# EAGLE board power source (EAGLE 5.11)
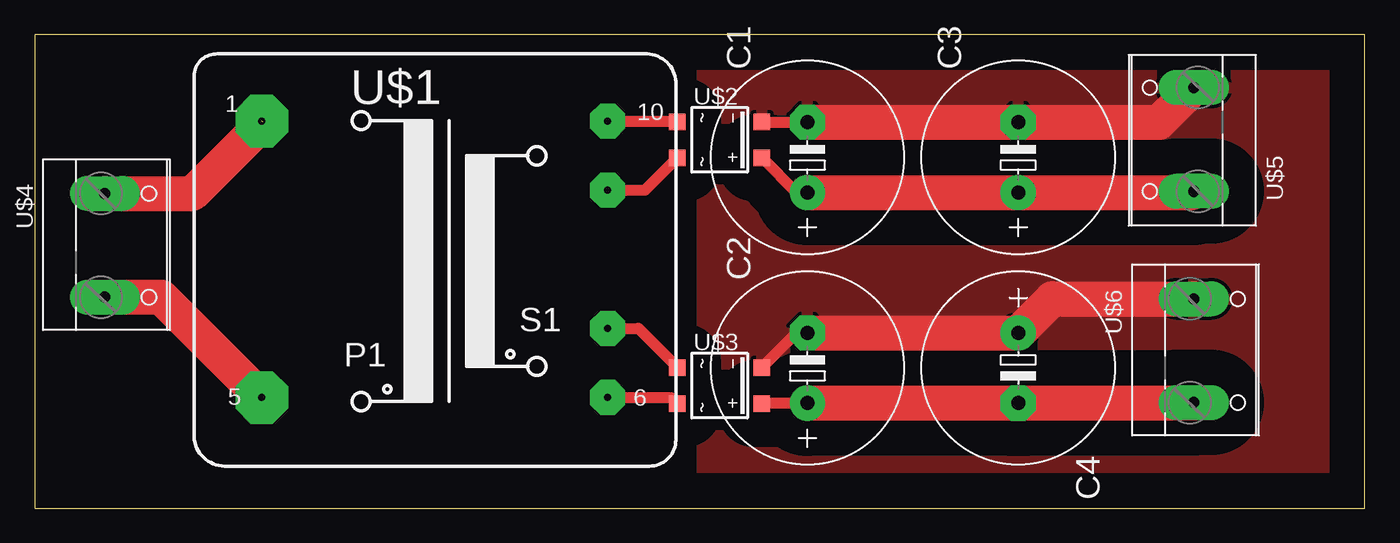
[diagram p0: board, top side]

Size 96.19 x 34.28 mm. Coordinates in mm from the lower left corner, seen from the top.
Outline: 0,0 96.19,0 96.19,34.28 0,34.28 0,0
Copper layers (1*16): Top 0.035mm / dielectric 1.5mm / Bottom 0.035mm
Design rules "default": minimum track width 10mil, minimum drill 24mil, track to track 8mil, track to pad 8mil, pad to pad 8mil, via to via 8mil, smd to smd 8mil, copper to edge 40mil, drill to drill 8mil, minimum pad ring 10mil, minimum via ring 8mil, stop-mask expansion 4mil, vias tented up to drill 0mil, thermal gap 10mil

## Footprints (pad centres in the part's own frame; a part is rotated, then mirrored left to right if it is on the bottom)
E5-13 = drill 1.016 pad 2.54 round: + -2.54,0 | drill 1.016 pad 2.54 octagon: - 2.54,0
BVEI382 = drill 0.5 pad 3.81 octagon: P1 5,-5; P2 5,-25 | drill 0.5 pad 2.54 octagon: S1 30,-25; S2 30,-20; S3 30,-10; S4 30,-5
SOIC-4 = smd 1.2 x 1.2: + 1.3,3.05; - -1.3,3.05; ~1 -1.3,-3.05; ~2 1.3,-3.05
110/2 = drill 0.8 pad 2.54 long: P$1 -3.73,0; P$2 3.77,0

## Placement (x,y rotation side)
C1  1000uF  [E5-13]  55.88,25.4 90 top
C2  1000uF  [E5-13]  55.88,10.16 90 top
C3  1000uF  [E5-13]  71.12,25.4 90 top
C4  1000uF  [E5-13]  71.12,10.16 270 top
U$1  BVEI382  [BVEI382]  11.43,33.02 0 top
U$2  ABS10  [SOIC-4]  49.53,26.67 270 top
U$3  ABS10  [SOIC-4]  49.53,8.89 270 top
U$4  110/2  [110/2]  5.08,19.05 270 top
U$5  110/2  [110/2]  83.82,26.67 90 top
U$6  110/2  [110/2]  83.82,11.43 270 top

## Library data of the parts
C1-C4 = resistor
U$1 = trafo2-2
U$2 U$3 = rectifier
U$4-U$6 = con-wago-500

## Nets
GND: C1.- C2.- C3.- C4.+ U$2.- U$3.- U$5.P$2 U$6.P$1
N$1: U$1.S3 U$2.~2
N$2: U$1.S4 U$2.~1
N$3: U$1.S2 U$3.~1
N$4: U$1.S1 U$3.~2
N$5: U$1.P1 U$4.P$1
N$6: U$1.P2 U$4.P$2
N$7: C2.+ C4.- U$3.+
N$8: U$6.P$2
VCC: C1.+ C3.+ U$2.+ U$5.P$1

## Tracks (layer width: path | path; a pad name or v marks a point on that pad's centre or on a via)
GND
  Top 0.406: U$2.- 52.61,27.94 | 55.09,12.7 C2.-
  Top 0.813: 52.61,27.94 C1.- | U$3.- 55.09,12.7
  Top 2.54: C1.- C3.- 81.32,27.94 U$5.P$2 | C2.- C4.+ 73.58,15.16 U$6.P$1
  pour Top (isolate 2.54): 48.26,36.83 48.26,-1.27 96.52,-1.27 96.52,36.83
N$1
  Top 0.813: U$2.~2 44.13,23.02 U$1.S3
N$2
  Top 0.406: 46.43,28.02 U$2.~1
  Top 0.813: U$1.S4 46.43,28.02
N$3
  Top 0.813: U$3.~1 43.65,13.02 U$1.S2
N$4
  Top 0.406: 46.05,8.02 U$3.~2
  Top 0.813: U$1.S1 46.05,8.02
N$5  (1 unrouted)
  Top 0.406: 16.51,27.86 16.51,27.94
  Top 2.54: 16.51,27.86 11.43,22.78 U$4.P$1
N$6
  Top 2.54: U$1.P2 9.17,15.28 U$4.P$2
N$7
  Top 0.406: U$3.+ 52.61,7.62
  Top 0.813: 52.61,7.62 C2.+
  Top 1.778: C4.- 71.75,7.62
  Top 2.54: C2.+ C4.- | 71.75,7.62 83.82,7.62
VCC
  Top 0.406: 55.09,22.86 C1.+ | 83.74,22.86 U$5.P$1
  Top 0.813: U$2.+ 55.09,22.86
  Top 2.54: C1.+ C3.+ 83.74,22.86